# Altium PCB Green.PcbDoc (part 2 of 2)
Units mil, origin at the board's own origin, x right, y up, seen from the top; angles counter-clockwise.
Board outline 6000 x 4000 mil, 4 copper layers (Top Layer, VCC, GND, Bottom Layer); 96 components, 58 nets, 276 pads, 296 vias.
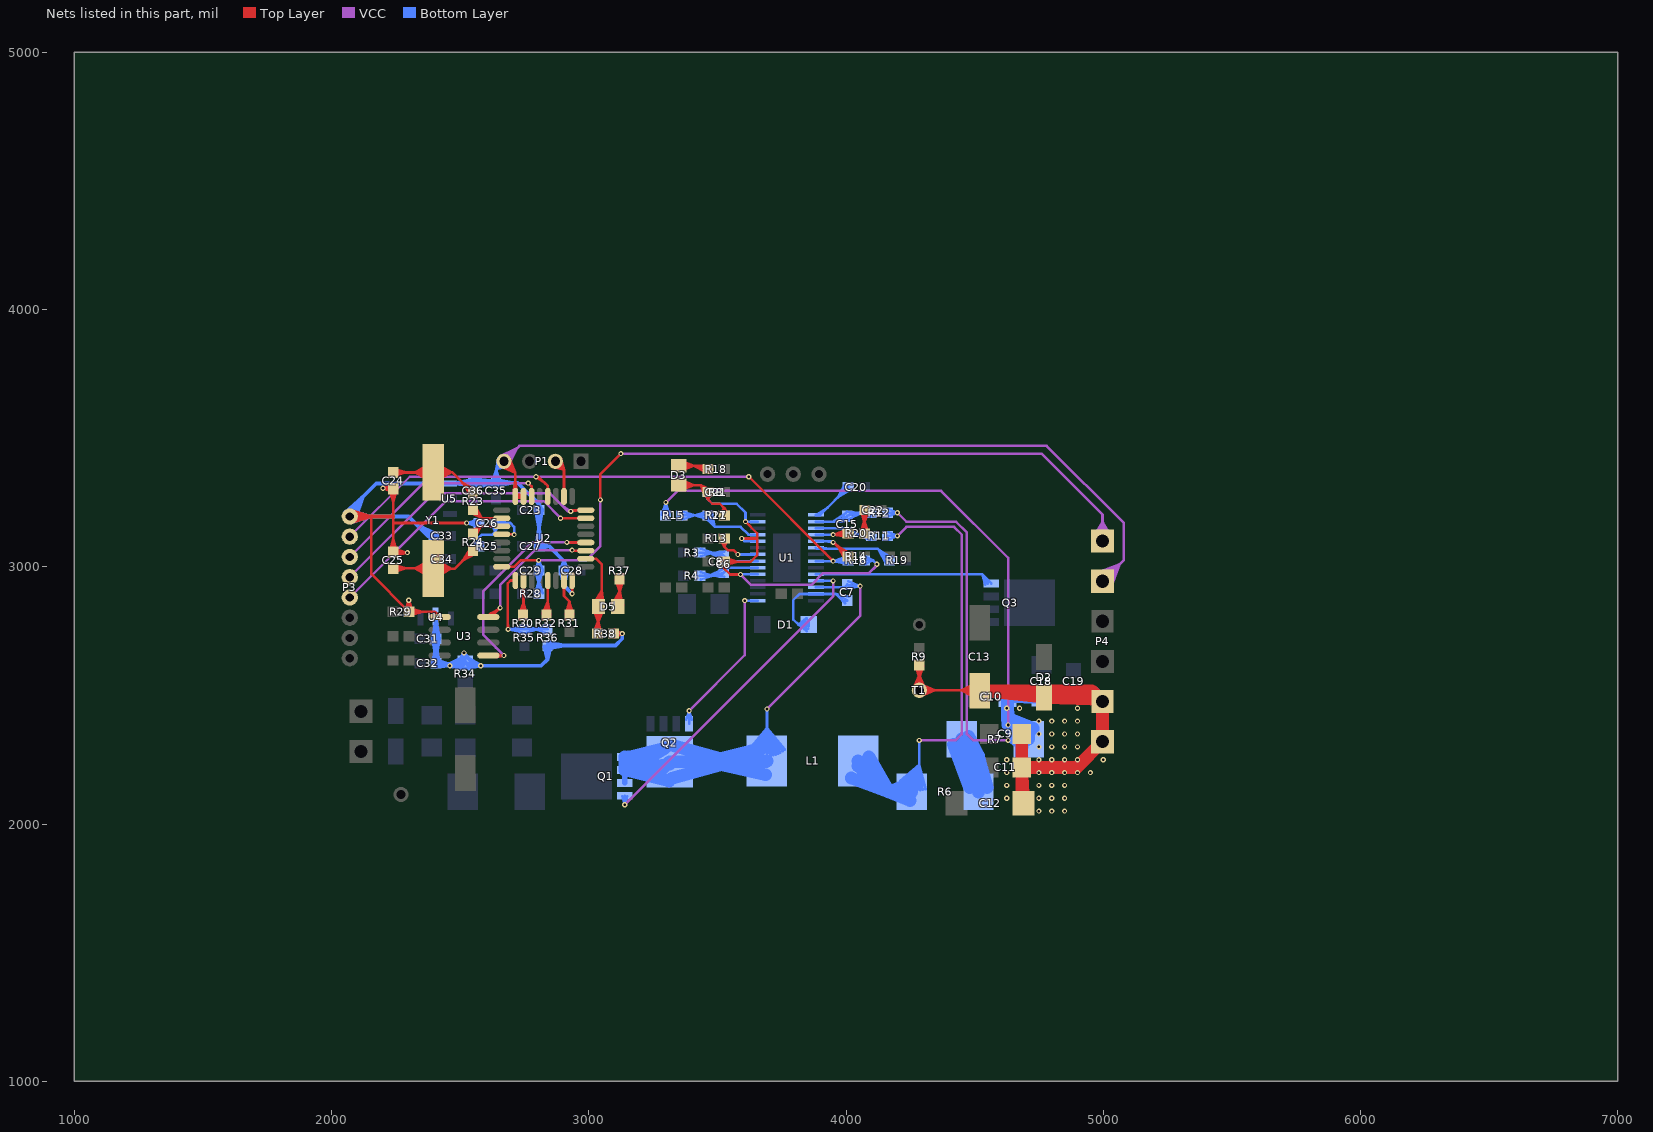
[diagram p4: the nets of this part, all layers, seen from the top]

## Via types
v1: diameter 20, hole 10, Top Layer to Bottom Layer, tented both sides, 286 vias
v2: diameter 20, hole 10, Top Layer to Bottom Layer, 8 vias
v3: diameter 25, hole 15, Top Layer to Bottom Layer, tented both sides, 2 vias

## Nets (pads, with @x,y where several pads share a name; then routed paths per layer and width w, separated by ;. In a path a pad name is that pad's centre, name@x,y a point inside that pad or via, vN(x,y) a via of type N, cw(c..) or ccw(c..) an arc to the next point about the centre after c; other vN are vias at no path point) (continued)
LP-: C23.1 C24.2 C25.2 C26.1 C27.2 C28.1 C31.1 C32.1 C33.1 C34.1 C35.1 C36.1 P1.4 P3.1 P4.5 R29.1 R34.1 R36.1 R38.2 U2.16 U2.31 U2.32 U3.5 U4.2 U5.1 | length 18503.3
  Top Layer w10: 2155,3195.59 2155,2971.5 R29.1@2301.5,2825 ; C25.2@2225.45,3060.46 2239.41,3108.16 ; C24.2@2225.48,3299.37 2240,3251.85 ; C24.2@2236.77,3289.18 v1(2200,3305) ; C24.2@2237.85,3318.03 v1(2200,3305) ; 2239.41,3195.59 2239.41,3170 ; C25.2@2240,3058.46 2239.41,3108.16 ; 2240,3195.59 C24.2@2240,3303.5 ; C24.2@2240,3301.54 2240,3251.85 ; C25.2@2241.73,3041.91 v1@2289.71,3055 ; C25.2@2242.6,3070.95 v1@2289.71,3055 ; C25.2@2254.5,3060.81 2239.41,3108.16 ; C24.2@2254.52,3299.37 2240,3251.85 ; C25.2@2255.01,3056.04 v1(2295,3055) ; C25.2@2255.64,3045.71 v1(2295,3055) ; C25.2@2255.98,3066.42 v1(2295,3055) ; R29.1@2286.94,2826.91 v1(2300,2870) ; R29.1@2303.46,2825 2353.15,2825 ; R29.1@2305.63,2810.48 2353.15,2825 ; R29.1@2305.63,2839.52 2353.15,2825 ; R29.1@2315.9,2827.87 v1(2300,2870) ; U3.5@2415.15,2800.8 2400.51,2825 ; U3.5@2420.51,2805 2400.51,2825 ; U3.5@2424.71,2810.36 2400.51,2825 ; 2485,3170 v1(2525,3170) 2239.41,3170 ; P1.4@2656.34,3389.63 2714.76,3365.24 ; P1.4@2660.97,3398.62 2714.76,3365.24 ; P1.4@2670,3410 2714.76,3365.24 ; P1.4@2681.38,3419.03 2714.76,3365.24 ; P1.4@2690.37,3423.66 2714.76,3365.24 ; U2.32@2708.95,3296.44 2714.76,3336.85 ; U2.32@2714.22,3267.58 U2.31@2745.72,3267.58 ; U2.32@2714.22,3279.19 U2.31@2745.72,3279.19 ; U2.32@2714.76,3296.02 2714.76,3336.85 ; U2.32@2715.3,3267.58 U2.31@2746.26,3273.39 ; U2.32@2715.3,3279.19 U2.31@2746.26,3273.39 ; U2.32@2716.36,3267.78 U2.31@2745.72,3279.19 ; U2.32@2716.36,3278.99 U2.31@2745.72,3267.58 ; U2.32@2720.58,3296.44 2714.76,3336.85 ; v1(2935,2895) U2.16@2935,2946.38 ; v1(2200,3305) 2238.5,3305 C24.2@2240,3303.5 ; v1(2200,3305) C24.2@2240,3303.5 ; 2239.41,3170 2239.41,3057.09 C25.2@2240,3056.5 ; C25.2@2240,3056.5 2241.5,3055 v1(2295,3055) ; C25.2@2240,3056.5 v1@2289.71,3055 ; v1(2300,2870) 2300,2826.5 R29.1@2301.5,2825 ; v1(2300,2870) R29.1@2301.5,2825 ; R29.1@2301.5,2825 2400.51,2825 ; U2.32@2714.76,3273.39 U2.31@2746.26,3273.39 ; U2.32@2714.76,3273.39 2714.76,3365.24 ; U2.32@2714.76,3273.39 U2.31@2745.72,3267.58 ; U2.32@2714.76,3273.39 U2.31@2745.72,3279.19 ; v1(3130,2740) R38.2@3096.5,2740 v1(3130,2740) ; v1(3130,2740) 3101.88,2754.28 v1(3130,2740) ; v1(3130,2740) 3101.88,2725.72 v1(3130,2740) ; v1(3130,2740) 3098.46,2740 v1(3130,2740)
  Top Layer w15: P3.1@2070.87,3195.59 2155,3195.59 2239.41,3195.59 ; P3.1@2071.4,3186.61 2147.36,3195.59 ; P3.1@2071.4,3204.57 2147.36,3195.59 ; P3.1@2074.63,3171.89 2147.36,3195.59 ; P3.1@2074.63,3219.29 2147.36,3195.59
  VCC w10: P1.4@2655.88,3430.05 2720.74,3460.74 ; P1.4@2660.82,3421.26 2720.74,3460.74 ; P1.4@2670,3410 2730,3470 4780,3470 5080,3170 5080,3026.57 P4.5@4997.28,2943.86 ; P1.4@2681.26,3400.82 2720.74,3460.74 ; P1.4@2690.05,3395.88 2720.74,3460.74 ; P4.5@4975.56,2977.78 5063.77,3010.35 ; P4.5@4979.6,2968.43 5063.77,3010.35 ; P4.5@4984.58,2959.66 5063.77,3010.35 ; P4.5@4990.43,2951.51 5063.77,3010.35 ; P4.5@5004.94,2937 5063.77,3010.35 ; P4.5@5013.08,2931.15 5063.77,3010.35 ; P4.5@5021.86,2926.18 5063.77,3010.35 ; P4.5@5031.2,2922.14 5063.77,3010.35
  Bottom Layer w10: C32.1@2406.5,2625 C32.1@2416.5,2615 ; C26.1@2569.22,3155.5 v1(2525,3170) ; C26.1@2569.22,3184.5 v1(2525,3170) ; C26.1@2571.54,3170 v1(2525,3170) ; C26.1@2573.5,3170 v1(2525,3170) ; C35.1@2625.48,3330.63 2640,3378.15 ; C35.1@2640,3326.5 2640,3380 ; C35.1@2640,3328.46 2640,3378.15 ; P1.4@2648.38,3421.59 2640,3380 ; C35.1@2654.52,3330.63 2640,3378.15 ; P1.4@2658.12,3418.36 2640,3380 ; P1.4@2670,3410 2640,3380 ; P1.4@2678.36,3398.12 2640,3380 ; P1.4@2681.59,3388.38 2640,3380
  Bottom Layer w15: P3.1@2052.82,3211.41 2121.11,3271.11 ; P3.1@2063.63,3200.94 2121.11,3271.11 ; P3.1@2071.4,3186.61 2147.36,3195.59 ; P3.1@2071.4,3204.57 2147.36,3195.59 ; P3.1@2074.63,3171.89 2147.36,3195.59 ; P3.1@2074.63,3219.29 2147.36,3195.59 ; P3.1@2078.59,3190.99 2121.11,3271.11 ; P3.1@2092.43,3185.06 2121.11,3271.11 ; C34.1@2384.35,3029.91 C33.1@2389.9,3106.12 ; C34.1@2386.35,3030.82 C33.1@2398.5,3120 ; C33.1@2386.54,3117.69 2405,3054.08 ; 2388.31,3324.06 U5.1@2445.12,3324.06 ; C34.1@2388.45,3028.03 2405,2964.62 ; C34.1@2388.45,3031.97 2405,3095.3 ; C34.1@2388.58,3032.63 2408.47,3094.35 ; C33.1@2389.04,3110.39 2333.75,3161.25 ; C32.1@2394.37,2626.15 2406.5,2689.68 C32.1@2418.63,2626.15 ; C31.1@2394.37,2718.85 2406.5,2655.32 C31.1@2418.63,2718.85 ; C31.1@2394.34,2720.88 U4.2@2405,2783.39 ; C31.1@2394.37,2721.15 2406.5,2784.68 C31.1@2418.63,2721.15 ; C34.1@2396.54,3030 C33.1@2389.9,3106.12 ; C34.1@2398.5,3030 C33.1@2398.5,3120 ; C33.1@2402.38,3130.69 2333.75,3161.25 ; 2405,2925 2405,3113.5 C33.1@2398.5,3120 ; C32.1@2406.5,2625 C31.1@2406.5,2720 ; C31.1@2406.5,2726.56 U4.2@2405,2783.39 ; U4.2@2406.5,2805.51 C31.1@2406.5,2720 ; C34.1@2408.55,3032.02 C33.1@2389.9,3106.12 ; C34.1@2410.66,3030.82 C33.1@2398.5,3120 ; C33.1@2410.69,3120.07 2405,3054.08 ; C34.1@2412.65,3029.64 2408.47,3094.35 ; C34.1@2412.65,3029.71 2405,2964.62 ; C34.1@2412.65,3030.29 2405,3095.3 ; C32.1@2416.5,2615 2508.66,2615 R34.1@2520,2626.34 ; C31.1@2418.59,2721.46 U4.2@2405,2783.39 ; R34.1@2498.25,2629.8 v1(2515,2665) ; R34.1@2509.27,2645.39 v1(2460,2615) ; R34.1@2513.68,2647.44 2443.75,2615 ; R34.1@2514.33,2625.49 v1(2460,2615) ; R34.1@2514.4,2605.11 v1(2460,2615) ; R34.1@2519.88,2604.31 v1(2580,2615) ; R34.1@2520.09,2604.31 2443.75,2615 ; R34.1@2527.93,2646.89 v1(2580,2615) ; C36.1@2533.43,3324.06 U5.1@2476.61,3324.06 ; C36.1@2533.48,3325.87 U5.1@2476.61,3324.06 ; C36.1@2534.07,3316.64 U5.1@2476.61,3324.06 ; C36.1@2534.52,3335.39 U5.1@2476.61,3324.06 ; R34.1@2540.16,2635.22 v1(2515,2665) ; C36.1@2548.4,3338.58 U5.1@2485.22,3324.06 ; C36.1@2549.31,3314.33 U5.1@2485.22,3324.06 ; C36.1@2549.94,3312.34 2614.37,3318.11 ; C36.1@2550,3328.46 2618.61,3334.03 ; C36.1@2550.09,3340.65 2618.61,3334.03 ; C36.1@2550.69,3314.33 2614.78,3324.06 ; C36.1@2550.82,3314.34 C35.1@2640,3326.5 ; C36.1@2550.82,3338.65 C35.1@2640,3326.5 ; C36.1@2551.6,3338.58 2614.78,3324.06 ; C36.1@2552.06,3316.45 2618.61,3334.03 ; C36.1@2552.34,3336.48 2614.37,3318.11 ; C35.1@2638.4,3338.58 2575.18,3324.06 ; C35.1@2639.31,3314.33 2575.18,3324.06 ; C35.1@2641.15,3314.37 2704.69,3326.5 C35.1@2641.15,3338.63 ; C27.2@2794.37,3081.15 2806.5,3144.68 C27.2@2818.63,3081.15 ; C23.1@2794.37,3218.85 2806.5,3155.32 C23.1@2818.63,3218.85 ; C27.2@2808.46,3080 2845,3080 ; C27.2@2810.5,3067.99 2845,3080 ; C27.2@2810.5,3092.01 2845,3080 ; R36.1@2827.9,2690.09 2840,2640 ; R36.1@2840,2691.54 2840,2640 ; R36.1@2841.15,2681.37 2904.68,2693.5 R36.1@2841.15,2705.63 ; R36.1@2852.1,2690.09 2840,2640 ; C28.1@2891.39,2983.73 2903.5,2926.5 ; C28.1@2891.49,2987.03 2903.5,3021.5 ; C28.1@2915.52,2987.03 2903.5,3021.5 ; C28.1@2915.62,2983.73 2903.5,2926.5 ; v1(2935,2895) 2903.5,2926.5 ; v1(3130,2740) 3130,2720 3103.5,2693.5 R36.1@2840,2693.5 2840,2640 ; P3.1@2070.87,3195.59 2070.87,3220.87 2174.06,3324.06 U5.1@2460.87,3324.06 2637.56,3324.06 C35.1@2640,3326.5 ; P3.1@2070.87,3195.59 2299.41,3195.59 2375,3120 ; P3.1@2070.87,3195.59 2121.11,3271.11 ; 2333.75,3161.25 C33.1@2396.54,3120 ; 2375,3120 C33.1@2398.5,3120 ; 2375,3120 2393.09,3108.31 2375,3120 ; 2375,3120 2393.09,3131.69 2375,3120 ; 2375,3120 C33.1@2396.54,3120 ; 2375,3120 C33.1@2396.54,3120 ; C34.1@2389.43,3035.16 2405,3054.08 ; C34.1@2389.43,3035.16 2405,3054.08 ; C34.1@2389.43,3035.16 2405,3054.08 ; C33.1@2398.5,3120 2405,3054.08 ; C34.1@2400.47,3030 2408.47,3094.35 ; C34.1@2400.47,3030 2405,3054.08 ; C34.1@2400.47,3030 2405,3054.08 ; C34.1@2400.47,3030 2405,3054.08 ; C34.1@2400.47,3030 2405,3095.3 ; C34.1@2400.47,3030 2405,2964.62 ; U4.2@2405,2783.39 C31.1@2406.5,2720 ; 2405,3054.08 C34.1@2412.63,3030.8 ; 2405,3054.08 C34.1@2412.63,3030.8 ; 2405,3054.08 C34.1@2412.63,3030.8 ; 2443.75,2615 R34.1@2520,2626.34 ; 2443.75,2615 v1(2460,2615) ; 2443.75,2615 v1(2460,2615) ; 2443.75,2615 v1(2460,2615) ; v1(2460,2615) 2475.56,2615 ; v1(2460,2615) 2407.76,2612.84 2475.56,2615 ; v1(2460,2615) 2475.56,2615 ; v1(2460,2615) 2408.46,2625 2475.56,2615 ; v1(2460,2615) 2475.56,2615 ; v1(2460,2615) 2411.34,2636.84 2475.56,2615 ; U5.1@2485.22,3324.06 C36.1@2550,3326.5 ; v1(2515,2665) 2515,2631.34 2531.34,2615 v1(2580,2615) ; v1(2515,2665) R34.1@2520,2626.34 ; R34.1@2520,2626.34 v1(2580,2615) ; C36.1@2550,3324.53 2614.37,3318.11 ; C36.1@2550,3324.53 2575.18,3324.06 ; C36.1@2550,3324.53 2575.18,3324.06 ; C36.1@2550,3324.53 2575.18,3324.06 ; C36.1@2550,3326.5 2614.78,3324.06 ; C36.1@2550,3326.5 C35.1@2640,3326.5 ; C36.1@2552.73,3312.65 2575.18,3324.06 ; C36.1@2552.73,3312.65 2575.18,3324.06 ; C36.1@2552.73,3312.65 2575.18,3324.06 ; C36.1@2553.17,3336.29 2575.18,3324.06 ; C36.1@2553.17,3336.29 2575.18,3324.06 ; C36.1@2553.17,3336.29 2575.18,3324.06 ; 2575.18,3324.06 C35.1@2640,3326.5 ; v1(2580,2615) 2815,2615 2840,2640 ; C35.1@2640,3326.5 2723.5,3326.5 2806.5,3243.5 ; C23.1@2806.5,3220 2806.5,3243.5 ; C23.1@2806.5,3220 C27.2@2806.5,3080 2845,3080 ; C23.1@2806.5,3220 2806.5,3243.5 ; 2806.5,3243.5 2794.73,3223.16 2806.5,3243.5 ; 2806.5,3243.5 2818.26,3223.16 2806.5,3243.5 ; 2845,3080 2903.5,3021.5 ; 2903.5,2926.5 C28.1@2903.5,2985 2903.5,3021.5
NetC6_1: C6.1 R4.1 U1.6 | length 595.4
  Bottom Layer w10: R4.1@3431.5,2965 3511.5,2965 C6.1@3525,2978.5 3543.11,2996.61 U1.6@3656.81,2996.61 ; R4.1@3433.46,2965 3483.15,2965 ; R4.1@3435.63,2950.48 3483.15,2965 ; R4.1@3435.63,2979.52 3483.15,2965 ; C6.1@3520.2,2990.41 3469.17,2965 ; C6.1@3525,2976.54 3469.17,2965 ; C6.1@3526.09,2961.89 3469.17,2965 ; 3596.3,2996.61 U1.6@3633.19,2996.61
NetC6_2: C6.2 R3.1 U1.7 | length 595.9
  Bottom Layer w10: R3.1@3431.5,3055 3511.5,3055 C6.2@3525,3041.5 3544.29,3022.2 U1.7@3656.81,3022.2 ; R3.1@3433.46,3055 3483.15,3055 ; R3.1@3435.63,3040.48 3483.15,3055 ; R3.1@3435.63,3069.52 3483.15,3055 ; C6.2@3520.2,3029.59 3469.17,3055 ; C6.2@3525,3043.46 3469.17,3055 ; C6.2@3526.09,3058.11 3469.17,3055 ; 3596.3,3022.2 U1.7@3633.19,3022.2
NetC7_1: C7.1 L1.1 Q1.1 Q1.2 Q1.3 Q2.5 U1.26 | length 6198.6
  VCC w10: v1(3692.83,2447.17) 4055,2809.33 v1(4055,2925)
  Bottom Layer w10: L1.1@3623.46,2289.69 3692.83,2373.43 ; L1.1@3631.89,2283.37 3692.83,2373.43 ; L1.1@3640.76,2277.96 3692.83,2373.43 ; L1.1@3649.99,2273.48 3692.83,2373.43 ; L1.1@3659.5,2269.92 3692.83,2373.43 ; L1.1@3669.24,2267.28 3692.83,2373.43 ; L1.1@3679.12,2265.55 3692.83,2373.43 ; v1@3690,2450 v1(3692.83,2447.17) L1.1@3692.83,2245 ; L1.1@3692.83,2264.69 3692.83,2373.43 ; L1.1@3706.55,2265.55 3692.83,2373.43 ; L1.1@3716.43,2267.28 3692.83,2373.43 ; L1.1@3726.17,2269.92 3692.83,2373.43 ; L1.1@3735.68,2273.48 3692.83,2373.43 ; L1.1@3744.91,2277.96 3692.83,2373.43 ; L1.1@3753.78,2283.37 3692.83,2373.43 ; L1.1@3762.21,2289.69 3692.83,2373.43 ; U1.26@3883.19,2919.84 3993.35,2919.84 C7.1@4005,2931.5 4011.5,2925 v1(4055,2925) ; U1.26@3906.81,2919.84 3943.7,2919.84 ; C7.1@4005,2929.53 v1(4055,2925) ; C7.1@4005.83,2914.87 v1(4055,2925) ; C7.1@4008.45,2943.8 v1(4055,2925)
  Bottom Layer w20: Q1.3@3140,2160 Q1.2@3140,2210 Q1.1@3140,2260
  Bottom Layer w50: Q2.5@3323.79,2177.61 3554.96,2241.97 Q2.5@3323.79,2306.33 ; L1.1@3685.82,2298.28 3464.06,2241.97 ; L1.1@3687.23,2191.55 3464.06,2241.97 ; L1.1@3689.8,2241.97 Q2.5@3315,2241.97 Q2.5@3283.03,2210 ; L1.1@3692.83,2245 3464.06,2241.97 ; Q1.2@3140,2210 Q2.5@3283.03,2210 ; Q1.2@3140,2210 3311.36,2167.86 Q1.2@3154.57,2210 ; Q1.2@3140,2210 Q2.5@3294.92,2294.5 ; Q1.2@3140,2210 3315,2232.72 Q1.2@3154.57,2210 ; Q1.2@3140,2210 Q1.1@3140,2260 Q1.2@3154.57,2210 ; Q1.2@3154.57,2210 Q2.5@3283.03,2210 ; Q1.2@3154.57,2210 Q2.5@3294.92,2294.5 ; Q2.5@3294.92,2294.5 3154.57,2260 Q2.5@3294.92,2294.5
NetC7_2: C7.2 D1.2 U1.27 | length 842.3
  Bottom Layer w10: 3822.68,2894.25 U1.27@3859.57,2894.25 ; D1.2@3846.89,2749.96 3815,2775 ; D1.2@3846.89,2800.04 3815,2775 ; D1.2@3852.2,2758.85 3815,2775 ; D1.2@3852.2,2791.15 3815,2775 ; D1.2@3855.03,2768.52 3815,2775 ; D1.2@3855.03,2781.48 3815,2775 ; D1.2@3855.55,2775 3815,2775 ; U1.27@3906.81,2894.25 3943.7,2894.25 ; C7.2@3996.23,2858.69 3960.75,2894.25 ; C7.2@4005,2868.5 3986.5,2868.5 3960.75,2894.25 ; C7.2@4005,2870.47 3960.75,2894.25 ; C7.2@4009.99,2884.29 3960.75,2894.25 ; 3815,2775 3795,2795 3795,2870 3819.25,2894.25 U1.27@3883.19,2894.25 3960.75,2894.25
NetC15_1: C15.1 R11.1 U1.17 | length 584.8
  Bottom Layer w10: U1.17@3883.19,3150.16 3988.35,3150.16 C15.1@4005,3133.5 4018.5,3120 R11.1@4098.5,3120 ; U1.17@3906.81,3150.16 3943.7,3150.16 ; C15.1@4003.91,3116.89 4060.83,3120 ; C15.1@4005,3131.54 4060.83,3120 ; C15.1@4009.8,3145.41 4060.83,3120 ; R11.1@4094.37,3105.48 4046.85,3120 ; R11.1@4094.37,3134.52 4046.85,3120 ; R11.1@4096.54,3120 4046.85,3120
NetC15_2: C15.2 R12.1 U1.16 | length 932.3
  Bottom Layer w10: U1.16@3883.19,3175.75 3984.25,3175.75 ; U1.16@3906.81,3175.75 3943.7,3175.75 ; C15.2@3998.66,3207.77 3948.73,3175.75 ; C15.2@4003.91,3213.11 4060.83,3210 ; C15.2@4005,3198.46 4060.83,3210 ; C15.2@4007.89,3180.13 3948.73,3175.75 ; C15.2@4009.8,3184.59 4060.83,3210 ; R12.1@4094.37,3195.48 4046.85,3210 ; R12.1@4094.37,3224.52 4046.85,3210 ; R12.1@4096.54,3210 4046.85,3210 ; R12.1@4098.5,3210 4018.5,3210 C15.2@4005,3196.5 3984.25,3175.75 ; 3948.73,3175.75 C15.2@4005,3194.53 ; 3984.25,3175.75 4011.65,3181.44 3984.25,3175.75 ; 3984.25,3175.75 3992.63,3202.45 3984.25,3175.75 ; 3984.25,3175.75 C15.2@4005,3194.53 ; 3984.25,3175.75 C15.2@4005,3194.53
NetC20_2: C20.2 U1.15 | length 393.9
  Bottom Layer w10: 3928.91,3230.4 U1.15@3883.19,3201.34 3899.84,3201.34 C20.2@4008.5,3310 ; C20.2@3994.67,3318.66 3967.61,3269.1 ; C20.2@4006.54,3310 3967.61,3269.1 ; C20.2@4015.77,3298.58 3967.61,3269.1
NetC21_1: C21.1 D3.2 R21.1 | length 763.6
  Top Layer w10: D3.2@3350,3317.6 3435.91,3317.6 ; D3.2@3353.94,3317.6 3409.53,3317.6 ; D3.2@3354.95,3307.06 3409.53,3317.6 ; D3.2@3354.95,3328.14 3409.53,3317.6 ; D3.2@3357.75,3297.36 3409.53,3317.6 ; D3.2@3357.75,3337.83 3409.53,3317.6 ; C21.1@3449.03,3282.3 3435.91,3317.6 ; C21.1@3449.31,3286.22 3463.5,3261.5 ; C21.1@3461.54,3290 3435.91,3317.6 ; C21.1@3470.14,3301.9 3435.91,3317.6 ; C21.1@3477.69,3286.22 3463.5,3261.5 ; R21.1@3512.31,3203.78 3526.5,3228.5 ; R21.1@3526.5,3200 3526.5,3228.5 ; R21.1@3540.69,3203.78 3526.5,3228.5 ; 3435.91,3317.6 C21.1@3463.5,3290 3463.5,3261.5 ; 3463.5,3261.5 3480,3245 3510,3245 3526.5,3228.5
NetC22_2: C22.2 R20.2 | length 339.6
  Top Layer w10: R20.2@4056.97,3132.17 4071.5,3179.68 R20.2@4086.02,3132.17 ; C22.2@4058.9,3218.42 4071.5,3170.25 ; R20.2@4071.5,3130 C22.2@4071.5,3217.99 ; C22.2@4073.5,3220 4071.5,3170.25 ; C22.2@4087.93,3217.25 4071.5,3170.25
  Top Layer w12: C22.2@4071.5,3217.99 C22.2@4073.5,3220
NetC24_1: C24.1 R23.1 Y1.2 | length 1824.4
  Top Layer w10: C24.1@2240,3366.5 Y1.2@2394.49,3366.5 ; C24.1@2242.17,3351.97 2289.69,3366.5 C24.1@2242.17,3381.02 ; Y1.2@2385.49,3402.08 2323.66,3366.5 ; Y1.2@2386,3331.8 2323.66,3366.5 ; Y1.2@2389.95,3392.86 2323.66,3366.5 ; Y1.2@2390.32,3341.09 2323.66,3366.5 ; Y1.2@2393.01,3383.23 2323.66,3366.5 ; Y1.2@2393.25,3350.76 2323.66,3366.5 ; Y1.2@2394.67,3373.34 2323.66,3366.5 ; Y1.2@2394.76,3360.67 2323.66,3366.5 ; Y1.2@2395.28,3360.68 2466.34,3367.01 ; Y1.2@2395.28,3373.34 2466.34,3367.01 ; Y1.2@2396.87,3350.78 2466.34,3367.01 ; Y1.2@2396.87,3383.24 2466.34,3367.01 ; Y1.2@2399.86,3341.12 2466.34,3367.01 ; Y1.2@2399.86,3392.89 2466.34,3367.01 ; Y1.2@2404.26,3331.87 2466.34,3367.01 ; Y1.2@2404.26,3402.15 2466.34,3367.01 ; R23.1@2538.58,3279.23 2509.1,3327.39 ; R23.1@2550,3286.5 2469.49,3367.01 Y1.2@2395,3367.01 2323.66,3366.5 ; R23.1@2550,3288.46 2509.1,3327.39 ; R23.1@2558.66,3300.33 2509.1,3327.39
NetC25_1: C25.1 R24.1 Y1.1 | length 1821
  Top Layer w10: C25.1@2240,2993.5 2394.49,2993.5 Y1.1@2395,2992.99 ; C25.1@2242.17,2978.98 2289.68,2993.5 C25.1@2242.17,3008.03 ; Y1.1@2385.49,2957.92 2323.66,2993.5 ; Y1.1@2386,3028.2 2323.66,2993.5 ; Y1.1@2389.95,2967.14 2323.66,2993.5 ; Y1.1@2390.32,3018.91 2323.66,2993.5 ; Y1.1@2393.01,2976.77 2323.66,2993.5 ; Y1.1@2393.25,3009.24 2323.66,2993.5 ; Y1.1@2394.67,2986.66 2323.66,2993.5 ; Y1.1@2394.76,2999.33 2323.66,2993.5 ; Y1.1@2395.28,2986.66 2466.34,2992.99 ; Y1.1@2395.28,2999.32 2466.34,2992.99 ; Y1.1@2396.87,2976.76 2466.34,2992.99 ; Y1.1@2396.87,3009.22 2466.34,2992.99 ; Y1.1@2399.86,2967.11 2466.34,2992.99 ; Y1.1@2399.86,3018.88 2466.34,2992.99 ; Y1.1@2404.26,2957.85 2466.34,2992.99 ; Y1.1@2404.26,3028.13 2466.34,2992.99 ; R24.1@2538.58,3070.77 2509.1,3022.61 ; R24.1@2550,3061.54 2509.1,3022.61 ; R24.1@2550,3063.5 2479.49,2992.99 Y1.1@2395,2992.99 ; R24.1@2558.66,3049.67 2509.1,3022.61 ; 2323.66,2993.5 Y1.1@2395,2992.99
NetC26_2: C26.2 R25.1 U2.4 | length 621
  Top Layer w10: U2.4@2661.61,3125.75 2709.25,3125.75 v1(2710,3125) U2.4@2669.98,3125.75
  Bottom Layer w10: R25.1@2559.18,3083.22 2573.5,3113.5 ; R25.1@2573.5,3080 2573.5,3113.5 ; R25.1@2587.83,3083.22 2573.5,3113.5 ; C26.2@2622.17,3166.78 2636.5,3136.5 ; C26.2@2638.46,3170 2688.15,3170 ; C26.2@2640.63,3155.48 2688.15,3170 ; C26.2@2640.63,3184.52 2688.15,3170 ; C26.2@2650.82,3166.78 2636.5,3136.5 ; v1(2710,3125) 2710,3155 2695,3170 C26.2@2636.5,3170 2636.5,3136.5 ; 2573.5,3113.5 2585,3125 2625,3125 2636.5,3136.5
NetD3_1: D3.1 R18.2 | length 563.1
  Top Layer w10: D3.1@3350,3392.4 3451.1,3392.4 R18.2@3463.5,3380 ; D3.1@3353.94,3392.4 3409.53,3392.4 ; D3.1@3354.95,3381.86 3409.53,3392.4 ; D3.1@3354.95,3402.94 3409.53,3392.4 ; D3.1@3357.75,3372.17 3409.53,3392.4 ; D3.1@3357.75,3412.64 3409.53,3392.4 ; R18.2@3456.39,3366.25 3407.45,3392.4 ; R18.2@3461.54,3380 3407.45,3392.4 ; R18.2@3462.89,3394.62 3407.45,3392.4
NetD5_1: D5.1 R37.1 | length 544.6
  Top Layer w10: D5.1@3092.83,2855.35 3120,2905.21 ; D5.1@3102.08,2851.33 3120,2905.21 ; R37.1@3105.48,2949.37 3120,2901.85 ; D5.1@3112.4,2845 3120,2852.6 R37.1@3120,2953.5 ; D5.1@3112.4,2848.94 3120,2905.21 ; R37.1@3120,2951.54 3120,2901.85 ; D5.1@3122.98,2848.5 3120,2905.21 ; D5.1@3132.97,2849.93 3120,2905.21 ; R37.1@3134.52,2949.37 3120,2901.85
NetQ1_4: Q1.4 U1.25 | length 1494.4
  VCC w10: v1(3140,2075) 3950,2885 v1(3950,2945)
  Bottom Layer w10: Q1.4@3129.76,2108.47 v1(3140,2075) ; Q1.4@3140,2110 v1(3140,2075) ; Q1.4@3150.24,2108.47 v1(3140,2075) ; U1.25@3883.19,2945.43 3949.57,2945.43 v1(3950,2945) ; U1.25@3906.81,2945.43 v1@3943.7,2945.43 ; v1(3950,2945) 3909.99,2945.43 v1(3950,2945)
NetQ2_4: Q2.4 U1.1 | length 902.8
  VCC w10: v1(3390,2440) 3606.34,2656.34 v1(3606.34,2868.66) 3606.34,2828.66
  Bottom Layer w10: Q2.4@3390,2390 v1(3390,2440) ; Q2.4@3390,2400 v1(3390,2440) ; Q2.4@3400.24,2406.08 v1(3390,2440) ; U1.1@3633.19,2868.66 v1(3606.34,2868.66) U1.1@3656.81,2868.66 ; v1(3390,2440) 3379.76,2406.08 v1(3390,2440) ; v1(3390,2440) 3390,2404.57 v1(3390,2440)
NetQ3_4: Q3.4 U1.24 | length 859.4
  Bottom Layer w10: U1.24@3883.19,2971.02 4528.98,2971.02 ; U1.24@3906.81,2971.02 3943.7,2971.02 ; Q3.4@4540.95,2930.84 4528.98,2971.02 ; Q3.4@4550.43,2935 4528.98,2971.02 ; Q3.4@4558.61,2941.36 4528.98,2971.02 ; Q3.4@4565,2935 4528.98,2971.02
NetR6_2: R6.2 R7.2 | length 4208.8
  Bottom Layer w50: R7.2@4417.25,2309.14 R6.2@4481.17,2141.33 ; R7.2@4418.81,2304.69 R6.2@4514.92,2125 ; R7.2@4419.15,2303.93 R6.2@4514.92,2136.81 ; R7.2@4421.83,2299.16 R6.2@4548.68,2141.33 ; R7.2@4450.08,2330 4514.92,2265.16 ; R7.2@4481.11,2332.21 R6.2@4548.68,2141.33 ; R7.2@4483.03,2326.77 R6.2@4514.92,2136.81 ; R7.2@4483.16,2326.29 R6.2@4514.92,2125 ; R7.2@4484.03,2320.88 R6.2@4481.17,2141.33 ; R7.2@4434.33,2288 4514.92,2265.16 ; R7.2@4434.33,2288 4514.92,2265.16 ; R7.2@4434.33,2288 4514.92,2265.16 ; R7.2@4434.33,2288 4514.92,2265.16 ; R7.2@4434.33,2288 4514.92,2265.16 ; R7.2@4450.08,2318.19 4514.92,2265.16 ; R7.2@4450.08,2318.19 R6.2@4514.92,2125 ; R7.2@4450.08,2318.19 4514.92,2265.16 ; R7.2@4450.08,2318.19 R6.2@4514.92,2136.81 ; R7.2@4450.08,2318.19 4514.92,2265.16 ; R7.2@4450.08,2318.19 4514.92,2265.16 ; R7.2@4450.08,2318.19 R6.2@4481.17,2141.33 ; R7.2@4450.08,2318.19 R6.2@4548.68,2141.33 ; R7.2@4450.08,2318.19 4514.92,2265.16 ; R7.2@4476.55,2339.62 4514.92,2265.16 ; R7.2@4476.55,2339.62 4514.92,2265.16 ; R7.2@4476.55,2339.62 4514.92,2265.16 ; R7.2@4476.55,2339.62 4514.92,2265.16 ; R7.2@4476.55,2339.62 4514.92,2265.16 ; R6.2@4481.17,2141.33 4514.92,2265.16 ; R6.2@4514.92,2125 4514.92,2265.16 ; R6.2@4514.92,2136.81 4514.92,2265.16 ; 4514.92,2265.16 R6.2@4548.68,2141.33
NetR13_1: R13.1 U1.8 | length 298.7
  Top Layer w10: R13.1@3512.22,3106.58 3526.5,3078.5 ; R13.1@3526.5,3110 3526.5,3078.5 ; R13.1@3540.78,3106.58 3526.5,3078.5 ; 3526.5,3078.5 3540,3065 3562.8,3065 ; 3562.8,3065 v1(3580,3047.8) 3562.8,3065
  Bottom Layer w10: v1(3580,3047.8) U1.8@3656.81,3047.8 ; 3596.3,3047.8 U1.8@3633.19,3047.8
NetR14_1: R14.1 U1.19 | length 482.4
  Top Layer w10: 3982.8,3065.71 v1(3950,3095) 3953.5,3095 R14.1@4008.5,3040 ; R14.1@3994.67,3031.34 3967.61,3080.9 ; R14.1@4006.54,3040 3967.61,3080.9 ; R14.1@4015.77,3051.42 3967.61,3080.9
  Bottom Layer w10: U1.19@3883.19,3098.98 3946.02,3098.98 v1(3950,3095) ; U1.19@3906.81,3098.98 v1@3943.7,3098.98 ; U1.19@3908.9,3098.98 v1(3950,3095) ; U1.19@3909.12,3098.98 v1(3950,3095)
NetR15_2: R15.2 R17.1 U1.11 | length 802
  Bottom Layer w10: R15.2@3361.5,3200 R17.1@3463.5,3200 3463.5,3181.5 3490,3155 ; R15.2@3363.46,3200 3413.15,3200 ; R15.2@3365.63,3185.48 3413.15,3200 ; R15.2@3365.63,3214.52 3413.15,3200 ; R17.1@3453.72,3191.2 3490,3155 ; R17.1@3459.37,3185.48 3411.85,3200 ; R17.1@3459.37,3214.52 3411.85,3200 ; R17.1@3461.54,3200 3411.85,3200 ; R17.1@3465.47,3200 3490,3155 ; R17.1@3479.24,3205.11 3490,3155 ; U1.11@3633.19,3124.57 3620.43,3124.57 ; U1.11@3656.81,3124.57 3620.43,3124.57 ; 3490,3155 3590,3155 3620.43,3124.57
NetR19_1: R19.1 U1.20 | length 512
  Bottom Layer w10: U1.20@3883.19,3073.39 3886.57,3070 4123.5,3070 R19.1@4168.5,3025 ; U1.20@3906.81,3073.39 3943.86,3070 ; R19.1@4154.67,3016.34 4127.61,3065.9 ; R19.1@4166.54,3025 4127.61,3065.9 ; R19.1@4175.77,3036.42 4127.61,3065.9
NetR20_1: R20.1 U1.18 | length 516.7
  Top Layer w10: R20.1@3988.89,3138.41 v1(3950,3125) ; R20.1@3989.78,3118.48 v1(3950,3125) ; R20.1@3989.95,3128.34 v1(3950,3125) ; R20.1@4002.95,3144.24 v1@3956.56,3125 ; R20.1@4005.85,3115.33 v1@3956.56,3125 ; R20.1@4006.54,3130 v1@3956.56,3125 ; R20.1@4008.5,3130 4003.5,3125 v1(3950,3125)
  Bottom Layer w10: U1.18@3883.19,3124.57 3949.57,3124.57 v1(3950,3125) ; U1.18@3906.81,3124.57 v1@3943.7,3124.57 ; v1(3950,3125) 3909.99,3124.57 v1(3950,3125)
NetR23_2: R23.2 U2.2 | length 269.4
  Top Layer w10: R23.2@2541.68,3209.43 2584.76,3188.74 ; R23.2@2550,3221.54 2584.76,3188.74 ; R23.2@2550,3223.5 2584.76,3188.74 ; R23.2@2561.6,3230.54 2584.76,3188.74 ; U2.2@2661.61,3188.74 2584.76,3188.74
NetR24_2: R24.2 U2.3 | length 250.7
  Top Layer w10: R24.2@2541.99,3140.77 2580.75,3157.24 ; R24.2@2550,3126.5 2580.75,3157.24 ; R24.2@2550,3128.46 2580.75,3157.24 ; R24.2@2561.75,3119.66 2580.75,3157.24 ; U2.3@2661.61,3157.24 2580.75,3157.24
NetR30_2: R30.2 U2.10 | length 283
  Top Layer w10: R30.2@2730.54,2816 2746.26,2863.18 ; R30.2@2745,2813.46 2746.26,2863.18 ; R30.2@2746.26,2812.76 U2.10@2746.26,2946.61 ; R30.2@2759.57,2815.26 2746.26,2863.18
NetR31_2: R31.2 U2.15 | length 293
  Top Layer w10: U2.15@2903.74,2946.61 2903.74,2886.26 2925,2865 R31.2@2925,2811.5 ; R31.2@2910.48,2815.63 2925,2863.15 ; R31.2@2925,2813.46 2925,2863.15 ; R31.2@2939.52,2815.63 2925,2863.15
NetR32_2: R32.2 U2.13 | length 289.7
  Top Layer w10: R32.2@2820.8,2817.22 2840.75,2863.87 ; R32.2@2835,2811.5 2840.75,2817.24 U2.13@2840.75,2946.61 ; R32.2@2835,2813.46 2840.75,2863.87 ; R32.2@2849.68,2813.93 2840.75,2863.87
NTC1+: C29.2 P4.6 R28.2 U2.8 | length 3972.8
  Top Layer w10: U2.8@2661.61,2999.76 2709.76,2999.76 2735,3025 v1(2805,3025) ; v1(3045,3260) 3045,3360 v1(3125,3440)
  VCC w10: v1(2805,3025) 2990,3025 3045,3080 v1(3045,3260) 3045,3220 ; v1(3125,3440) 4760,3440 4997.28,3202.72 P4.6@4997.28,3099.76 ; P4.6@4958.48,3110.54 4997.28,3175.04 ; P4.6@4967.63,3105.85 4997.28,3175.04 ; P4.6@4977.19,3102.49 4997.28,3175.04 ; P4.6@4987.03,3100.47 4997.28,3175.04 ; P4.6@5007.54,3100.47 4997.28,3175.04 ; P4.6@5017.37,3102.49 4997.28,3175.04 ; P4.6@5026.94,3105.85 4997.28,3175.04 ; P4.6@5036.09,3110.54 4997.28,3175.04
  Bottom Layer w10: R28.2@2791.97,2897.17 2806.5,2944.68 R28.2@2821.02,2897.17 ; C29.2@2791.97,2982.83 2806.5,2935.32 C29.2@2821.02,2982.83 ; C29.2@2791.97,2987.15 v1(2805,3025) ; C29.2@2805,2986.5 v1(2805,3025) ; R28.2@2806.5,2895 C29.2@2806.5,2985 v1(2805,3025) ; C29.2@2820.82,2988.23 v1(2805,3025)
PWM: P3.2 R16.1 U1.22 U2.28 | length 2856.9
  Top Layer w10: 2831.74,3323.26 v1(2795,3350) 2805,3350 2840.75,3314.25 U2.28@2840.75,3273.39 ; v1(3622.2,3350) v1(3950,3022.2) 3918.79,3053.42
  VCC w10: P3.2@2070.87,3116.85 2304.02,3350 v1(2795,3350) ; 2755,3350 v1(2795,3350) ; v1(3622.2,3350) v1(2795,3350)
  Bottom Layer w10: U1.22@3883.19,3022.2 v1(3950,3022.2) ; U1.22@3906.81,3022.2 v1@3943.7,3022.2 ; R16.1@3989.2,3034.11 v1(3950,3022.2) ; R16.1@3989.68,3014.17 v1(3950,3022.2) ; R16.1@3989.99,3024.07 v1(3950,3022.2) ; R16.1@4003.56,3039.38 v1@3956.77,3022.2 ; R16.1@4005.19,3010.38 v1@3956.77,3022.2 ; R16.1@4006.54,3025 v1@3956.77,3022.2 ; R16.1@4008.5,3025 4005.71,3022.2 v1(3950,3022.2) ; v1(3950,3022.2) 3910,3022.2 v1(3950,3022.2)
RXD: U2.20 U3.1 | length 1032
  Top Layer w10: U3.1@2609.49,2655 v1(2670,2655) ; U3.1@2640.98,2655 v1(2670,2655) ; U3.1@2641.78,2648.24 v1(2670,2655) ; U3.1@2641.78,2661.76 v1(2670,2655) ; v1@2915,3094.25 U2.20@2988.39,3094.25 ; v1(2915,3095) U2.20@2955.02,3094.25
  VCC w10: 2638.79,2686.21 v1(2670,2655) 2590,2735 2590,2905 2780,3095 v1(2915,3095) 2875,3095
SENSE_N: C9.2 C10.2 C11.2 C12.1 C13.1 C18.2 C19.2 D2.2 P4.1 P4.2 R7.1 R9.2 R12.2 R15.1 T1.1 | length 12084.6
  Top Layer w10: T1.1@4261,2525.05 4285,2579.53 ; R9.2@4270.48,2614.37 4285,2566.85 ; T1.1@4270.58,2521.77 4285,2579.53 ; R9.2@4285,2616.54 4285,2566.85 ; R9.2@4285,2618.5 T1.1@4285,2520 4518.11,2520 C13.1@4520,2518.11 4450.6,2520 ; T1.1@4286.77,2505.58 4344.53,2520 ; T1.1@4286.77,2534.42 4344.53,2520 ; T1.1@4290.05,2496 4344.53,2520 ; T1.1@4290.05,2544 4344.53,2520 ; T1.1@4299.42,2521.77 4285,2579.53 ; R9.2@4299.52,2614.37 4285,2566.85 ; T1.1@4309,2525.05 4285,2579.53 ; C13.1@4510.59,2485.05 4450.6,2520 ; C13.1@4512.4,2551.63 4450.6,2520 ; C13.1@4515.07,2494.24 4450.6,2520 ; C13.1@4516.38,2542.21 4450.6,2520 ; C13.1@4518.12,2503.86 4450.6,2520 ; C13.1@4518.9,2532.44 4450.6,2520
  Top Layer w50: 4711.3,2499.62 C13.1@4520,2518.11 ; D2.2@4767.13,2518.11 P4.2@4997.28,2478.11 ; P4.2@4958.23,2484.9 D2.2@4770,2491.26 ; P4.2@4997.28,2474.17 P4.1@4997.28,2320.24 ; C13.1@4520,2518.11 P4.2@4955.31,2518.11 ; C13.1@4520,2518.11 4581.44,2518.11 D2.2@4770,2491.26 ; C11.2@4682.99,2220 4897.05,2220 P4.1@4997.28,2320.24 ; C11.2@4682.99,2220 C9.2@4682.99,2350 4682.99,2223.94 4682.99,2346.06 C11.2@4682.99,2220 ; C11.2@4682.99,2220 4682.99,2087.01 4682.99,2216.06 4690,2084.92 C11.2@4682.99,2220 ; D2.2@4770,2491.26 P4.2@4955.31,2518.11 ; P4.2@4955.31,2518.11 P4.2@4997.28,2476.14 P4.1@4997.28,2320.24
  VCC w10: v1(3300,3250) 3345,3295 4370,3295 4630,3035 v1(4630,2385) ; v1(4200,3210) 4235,3175 4428.28,3175 4470,3133.28 4470,2350 4495,2325 v1(4630,2325)
  Bottom Layer w10: R15.1@3283.99,3202.22 v1@3298.5,3248.5 ; R15.1@3286.92,3211.57 v1(3300,3250) ; R15.1@3298.5,3200 v1@3298.5,3248.5 ; R15.1@3298.5,3209.92 v1(3300,3250) ; R15.1@3310.32,3210.82 v1(3300,3250) ; R15.1@3313.02,3202.22 v1@3298.5,3248.5 ; R12.2@4161.5,3210 v1(4200,3210) ; R12.2@4163.46,3210 v1(4200,3210) ; R12.2@4166.42,3195.61 v1(4200,3210) ; R12.2@4166.42,3224.39 v1(4200,3210) ; R7.1@4688.54,2379.64 v1(4630,2325) ; R7.1@4694.89,2278.08 v1(4630,2325) ; R7.1@4695.18,2371.52 v1(4630,2325) ; R7.1@4700.47,2286.97 v1(4630,2325) ; R7.1@4700.62,2362.76 v1(4630,2325) ; R7.1@4704.77,2296.34 v1(4630,2325) ; R7.1@4704.83,2353.51 v1(4630,2325) ; R7.1@4707.8,2306.04 v1(4630,2325) ; R7.1@4707.82,2343.9 v1(4630,2325) ; R7.1@4709.56,2315.95 v1(4630,2325) ; v1@3298.5,3248.5 v1(3300,3250) ; v1(4630,2325) 4704.92,2325 R7.1@4709.92,2330 v1(4630,2325)
  Bottom Layer w50: C18.2@4756.06,2492.01 C10.2@4627.99,2495 ; P4.2@4997.28,2474.17 P4.1@4997.28,2320.24 P4.2@4997.28,2476.14 4959.76,2513.66 C19.2@4885,2513.66 ; P4.2@4997.28,2478.11 C19.2@4885,2513.66 ; 4627.99,2411.93 C10.2@4627.99,2495 ; 4627.99,2411.93 R7.1@4709.92,2330 v1(4630,2385) ; 4627.99,2411.93 4683.97,2319.76 v1(4630,2385) ; 4627.99,2411.93 4727.7,2370.86 v1(4630,2385) ; 4627.99,2411.93 4709.92,2341.81 v1(4630,2385) ; 4627.99,2411.93 4627.99,2491.06 v1(4630,2385) ; 4627.99,2411.93 v1(4630,2385) ; 4627.99,2411.93 v1(4630,2385) ; 4627.99,2411.93 v1(4630,2385) ; 4627.99,2411.93 v1(4630,2385) ; 4627.99,2411.93 v1(4630,2385) ; 4627.99,2411.93 v1(4630,2385) ; C10.2@4627.99,2495 4757.01,2495 C18.2@4760,2492.01 ; C10.2@4627.99,2495 v1(4630,2385) ; C18.2@4760,2492.01 C19.2@4863.35,2492.01 ; C18.2@4760,2492.01 C19.2@4885,2513.66 ; C19.2@4863.35,2492.01 C19.2@4885,2513.66 ; C19.2@4863.35,2492.01 4763.94,2492.01 C19.2@4885,2513.66
  other v1: 4750,2050 4800,2050 4850,2050 4625,2100 4750,2100 4800,2100 4850,2100 4625,2150 4750,2150 4800,2150 4850,2150 4625,2200 4750,2200 4800,2200 4850,2200 4900,2200 4950,2200 4625,2250 4750,2250 4800,2250 4850,2250 4900,2250 5000,2250 4750,2300 4800,2300 4850,2300 4900,2300 4750,2350 4800,2350 4850,2350 4900,2350 4750,2400 4800,2400 4850,2400 4900,2400 4625,2450 4675,2450 4900,2450
SENSE_P: L1.2 R6.1 R11.2 | length 3569.1
  VCC w10: v1(4200,3120) 4235,3155 4420,3155 4450,3125 4450,2350 4425,2325 v1(4285,2325)
  Bottom Layer w10: R11.2@4161.5,3120 v1(4200,3120) ; R11.2@4163.46,3120 v1(4200,3120) ; R11.2@4166.42,3105.61 v1(4200,3120) ; R11.2@4166.42,3134.39 v1(4200,3120) ; R6.1@4210.14,2166.85 4285,2230.2 ; R6.1@4217.22,2159.33 4285,2230.2 ; R6.1@4224.94,2152.68 4285,2230.2 ; R6.1@4233.24,2146.91 4285,2230.2 ; R6.1@4242.04,2142.05 4285,2230.2 ; R6.1@4255.08,2125 4285,2154.92 v1(4285,2325) ; R6.1@4255.08,2136.81 4285,2230.2 ; R6.1@4268.74,2133.49 4285,2230.2 ; R6.1@4278.71,2132.34 4285,2230.2 ; R6.1@4288.82,2132.21 4285,2230.2 ; R6.1@4298.98,2133.14 4285,2230.2 ; R6.1@4309.11,2135.14 4285,2230.2
  Bottom Layer w50: L1.2@4020.29,2178.78 4167.17,2125 ; L1.2@4047.17,2225.31 4167.17,2125 ; L1.2@4047.17,2245 4167.17,2125 ; L1.2@4088.2,2260.01 4167.17,2125 ; R6.1@4248.48,2091.59 4167.17,2125 ; R6.1@4248.48,2158.41 4167.17,2125 ; R6.1@4255.08,2125 4167.17,2125
STATE: D5.2 R38.1 U2.18 | length 1074.3
  Top Layer w10: U2.18@2988.39,3031.26 3028.74,3031.26 3050,3010 3050,2857.4 D5.2@3037.6,2845 3037.6,2744.09 R38.1@3033.5,2740 3037.6,2790.04 ; D5.2@3017.36,2837.25 3037.6,2785.47 ; D5.2@3018.5,2856.62 3050,2907.33 ; R38.1@3019.2,2743.33 3037.6,2790.04 ; D5.2@3027.06,2840.05 3037.6,2785.47 ; D5.2@3027.47,2852.05 3050,2907.33 ; D5.2@3037.6,2841.06 3037.6,2785.47 ; D5.2@3037.6,2848.94 3050,2907.33 ; D5.2@3048.11,2847.66 3050,2907.33 ; R38.1@3048.16,2740.96 3037.6,2790.04 ; D5.2@3048.14,2840.05 3037.6,2785.47 ; D5.2@3057.83,2837.25 3037.6,2785.47 ; D5.2@3058.18,2848.2 3050,2907.33
SWCLK: P3.4 U2.24 | length 1164.5
  Top Layer w10: v1(2930,3215) U2.24@2971.68,3220.24 ; v1@2935.24,3220.24 U2.24@2988.39,3220.24
  VCC w10: P3.4@2070.87,2959.37 2396.5,3285 2850,3285 2920,3215 v1(2930,3215) 2892.6,3242.4
SWDIO: P3.5 U2.23 | length 1183.5
  Top Layer w10: 2930,3188.74 v1(2890,3188.75) U2.23@2988.39,3188.74
  VCC w10: P3.5@2070.87,2880.63 2445.24,3255 2825,3255 v1@2890,3190 ; 2859.49,3220.51 v1(2890,3188.75)
TEC: P3.3 U2.30 | length 869.9
  Top Layer w10: v1(2765,3325) 2777.76,3312.24 U2.30@2777.76,3273.39
  VCC w10: P3.3@2070.87,3038.11 2357.76,3325 v1(2765,3325)
TP1: P1.2 U2.26 | length 341.5
  Top Layer w10: P1.2@2857.7,3388.78 2903.74,3376.26 ; P1.2@2861.41,3398.28 2903.74,3376.26 ; P1.2@2870,3410 2903.74,3376.26 ; P1.2@2881.72,3418.59 2903.74,3376.26 ; P1.2@2891.22,3422.3 2903.74,3376.26 ; U2.26@2903.74,3273.39 2903.74,3376.26
TXD: U2.19 U3.4 | length 901.6
  Top Layer w10: U3.4@2605.83,2810.74 v1@2650.53,2835.18 ; U3.4@2613.88,2799.79 v1@2650.53,2835.18 ; 2619.57,2818.25 v1(2655.36,2840) ; U3.4@2621.62,2813.92 v1(2655.36,2840) ; U3.4@2623.83,2809.4 v1(2655.36,2840) ; U2.19@2975.21,3062.76 v1(2935,3065) 2937.24,3062.76 U2.19@2988.39,3062.76 ; v1@2650.53,2835.18 U3.4@2609.49,2805 2620.36,2805 v1(2655.36,2840)
  VCC w10: v1(2655.36,2840) 2655.36,2929.64 2790.71,3065 v1(2935,3065) 2895,3065
UVP: R35.1 R36.2 U2.9 | length 855.6
  Top Layer w10: 2685,2796.58 v1(2686.5,2756.5) 2685,2755 2685,2935 2696.61,2946.61 ; U2.9@2713.83,2940.86 2696.61,2946.61 ; U2.9@2713.83,2952.37 2696.61,2946.61 ; U2.9@2714.76,2946.61 2696.61,2946.61
  Bottom Layer w10: 2727.3,2748.25 v1(2686.5,2756.5) ; 2727.3,2764.74 v1(2686.5,2756.5) ; R35.1@2747.83,2741.97 2700.31,2756.5 ; R35.1@2747.83,2771.02 2700.31,2756.5 ; R35.1@2752.17,2741.97 2799.69,2756.5 R35.1@2752.17,2771.02 ; R36.2@2837.83,2741.97 2790.32,2756.5 R36.2@2837.83,2771.02 ; R36.2@2840,2756.5 R35.1@2750,2756.5 v1(2686.5,2756.5) ; v1(2686.5,2756.5) 2700.31,2756.5 ; v1(2686.5,2756.5) 2700.31,2756.5
VREF: C8.2 R8.1 R16.2 U1.5 U1.10 U1.13 | length 2096.5
  Top Layer w10: C8.2@3512.39,3015.93 3526.5,2993.5 ; C8.2@3528.46,3020 3578.15,3020 ; C8.2@3530.63,3005.48 3578.15,3020 ; C8.2@3530.63,3034.52 3578.15,3020 ; C8.2@3540.61,3015.93 3526.5,2993.5 ; v1(3595,3110) 3655,3110 ; v1(3609.25,3175.75) 3655,3130 3655,3110 ; 3526.5,2993.5 C8.2@3526.5,3020 3630,3020 3655,3045 3655,3110 ; 3526.5,2993.5 3550,2970 ; 3550,2970 v1(3590,2970) 3550,2970
  VCC w10: v1(3590,2970) 3630,2930 3865,2930 3910,2975 4090,2975 4120,3005 v1(4120,3010) 4091.77,2976.77
  Bottom Layer w10: R8.1@3449.31,3286.22 3463.5,3261.5 ; R8.1@3463.5,3290 3463.5,3261.5 ; R8.1@3477.69,3286.22 3463.5,3261.5 ; v1(3595,3110) 3605,3100 3655.79,3100 U1.10@3656.81,3098.98 ; v1@3596.3,2971.02 U1.5@3633.19,2971.02 ; U1.5@3630.04,2971.02 v1(3590,2970) ; U1.5@3630.08,2971.02 v1(3590,2970) ; U1.13@3633.19,3175.75 v1(3609.25,3175.75) ; U1.5@3656.81,2971.02 3591.02,2971.02 v1(3590,2970) ; U1.13@3656.81,3175.75 v1(3609.25,3175.75) ; R16.2@4071.5,3025 4105,3025 ; R16.2@4073.46,3025 4105,3025 ; R16.2@4076.88,3010.72 4105,3025 ; R16.2@4076.88,3039.28 4105,3025 ; 3463.5,3261.5 3480,3245 3575,3245 3609.25,3210.75 v1(3609.25,3175.75) ; 4105,3025 v1(4120,3010) 4105,3025
pads on no net: R10.3 U2.7 U2.11 U2.22 U2.25 U2.27 U2.29

## Polygon pours and split planes (outlines as drawn)
IN_P on Bottom Layer "IS_P" (solid, remove dead copper, pour order 35): 2000,2325 2025,2350 2575,2350 2600,2325 2600,2025 2575,2000 2225,2000 2175,2050 2175,2125 2125,2175 2050,2175 2000,2225 2000,2325
IN_N on Bottom Layer "IS_P" (solid, remove dead copper, pour order 34): 2675,2325 2700,2350 3065,2350 3095,2320 3095,2025 3070,2000 2700,2000 2675,2025 2675,2325
NetC7_1 on Bottom Layer "IS_P" (solid, remove dead copper, pour order 33): 3110,2325 3135,2350 3425,2350 3450,2375 3450,2405 3470,2425 3775,2425 3800,2400 3800,2025 3775,2000 3225,2000 3200,2025 3200,2125 3190,2135 3120,2135 3110,2145 3110,2325
SENSE_P on Bottom Layer "IS_P" (solid, remove dead copper, pour order 32): 3950,2400 3975,2425 4300,2425 4325,2400 4325,2025 4300,2000 3975,2000 3950,2025 3950,2400
NetR6_2 on Bottom Layer "IS_P" (solid, remove dead copper, pour order 31): 4350,2400 4375,2425 4550,2425 4575,2400 4575,2025 4550,2000 4375,2000 4350,2025 4350,2400
SENSE_N on Bottom Layer "IS_P" (solid, remove dead copper, pour order 30): 4575,2425 4575,2525 4600,2550 5050,2550 5075,2525 5075,2225 5025,2175 4950,2175 4900,2125 4900,2050 4850,2000 4625,2000 4600,2025 4600,2400 4575,2425
LD- on Bottom Layer "IS_P" (solid, remove dead copper, pour order 29): 4605,2580 4605,2950 4630,2975 4900,2975 4925,2950 4925,2900 4950,2875 5050,2875 5075,2850 5075,2585 5050,2560 4625,2560 4605,2580
GND on Bottom Layer "IS_P" (solid, remove dead copper, pour order 28): 2030,2500.08 2080,2550.08 2305,2550.08 2335,2580.08 3180,2580.08 3205,2605.08 3205,3450.08 3230,3475.08 4855,3475.08 4905,3425.08 4905,3350.08 4955,3300.08 5030,3300.08 5080,3250.08 5080,3200.08 5055,3175.08 4955,3175.08 4930,3150.08 4930,3025.08 4905,3000.08 4530,3000.08 4505,2975.08 4505,2935.08 4535,2905.08 4585,2905.08 4600,2890.08 4600,2580.08 4565,2545.08 4565,2470.08 4545,2450.08 4455,2450.08 4430,2475.08 3395,2475.08 3370,2450.08 3370,2380.08 3350,2360.08 2055,2360.08 2030,2385.08 2030,2500.08
GND on GND "IS_P" (solid, remove dead copper, pour order 37): 2330,2580 2025,2580 2000,2555 2000,2550 2000,2225 2050,2175 2125,2175 2175,2125 2175,2050 2225,2000 4850,2000 4900,2050 4900,2125 4950,2175 5025,2175 5075,2225 5075,3250 5025,3300 4950,3300 4900,3350 4900,3425 4850,3475 3225,3475 3200,3450 3200,2605 3175,2580 2330,2580
LP- on GND "IS_P" (solid, remove dead copper, pour order 36): 2000,3250 2050,3300 2125,3300 2175,3350 2175,3425 2225,3475 3150,3475 3175,3450 3175,2615 3150,2590 2025,2590 2000,2615 2000,3250
IN_P on Mechanical 15 "IS_P" (solid, remove dead copper): 2440,2050 2465,2050 2495,2020 2440,2020 2415,2020 2405,2030
LP- on Top Layer "IS_P" (solid, remove dead copper, pour order 39): 2000,3250 2050,3300 2125,3300 2175,3350 2175,3425 2225,3475 2300,3475 2325,3450 2325,2800 2300,2775 2050,2775 2025,2775 2000,2800 2000,3250
SENSE_N on Top Layer "IS_P" (solid, remove dead copper, pour order 41): 4475,2425 4450,2450 4450,2575 4475,2600 4550,2600 4600,2550 5050,2550 5075,2525 5075,2225 5025,2175 4950,2175 4900,2125 4900,2050 4850,2000 4625,2000 4600,2025 4600,2400 4575,2425 4475,2425
GND on Top Layer "IS_P" (solid, remove dead copper, pour order 40): 2000,2385 2025,2360 2635,2360 2675,2320 2675,2025 2700,2000 4550,2000 4575,2025 4575,2375 4550,2400 4475,2400 4425,2450 4425,2600 4450,2625 4575,2625 4640,2560 5050,2560 5075,2585 5075,3250 5025,3300 4950,3300 4900,3350 4900,3425 4850,3475 3225,3475 3200,3450 3200,2605 3175,2580 2455,2580 2425,2550 2020,2550 2000,2530 2000,2385
IN_P on Top Layer "IS_P" (solid, remove dead copper, pour order 38): 2000,2325 2025,2350 2575,2350 2600,2325 2600,2025 2575,2000 2225,2000 2175,2050 2175,2125 2125,2175 2050,2175 2000,2225 2000,2325

## Keep-outs
Keep-Out Layer:
  circle w5: c2066.93,3405.51 r61.02
  circle w5: c2066.93,2066.93 r61.02
  circle w5: c5019.69,2066.93 r61.02
  circle w5: c5019.69,3405.51 r61.02
  lines w5: 1968.5,1968.5 5118.11,1968.5 5118.11,3503.94 1968.5,3503.94 1968.5,1968.5

## Silkscreen, mask and mechanical layers (free items; w line width, h text height)
Top Overlay:
  drawing of 731 lines, arcs and shapes, not listed
  text "Designed as:" at 4245,3405 h50
  text "3V3" at 3050,3380 h40
  text "Input : 12V" at 4240,3320 h50
  text "FAULT" at 3015,3274.57 h50
  text "6AMax" at 4780,3235 h50
  text "Output:  4V" at 4230,3230 h50
  text "GND" at 4215,2825 h40
  text "PWR" at 3265,2789.57 h50
  text "DO NOT USE HANDS !" at 3045,2530 h50
  text "LD+" at 4225,2415 h40
  text "WEAR GLOVES !" at 3183,2120 h50
  text "12V" at 2230,2030 h40
  text "AOE-G-3.1 2015.6" at 3100,2015 h50
Bottom Overlay:
  circle w10: c2066.93,2066.93 r106.3
  circle w10: c2066.93,3405.51 r106.3
  circle w10: c5019.69,2066.93 r106.3
  circle w10: c5019.69,3405.51 r106.3
  lines w2: 2875,2895 2875,2920 2845.87,2949.13 2845.87,2949.57 ; 3955,3255 3995,3255 4009.13,3240.87 ; 3969.13,3235.87 3969.57,3235.87 ; 2845.87,2949.57 2848.78,2949.57 2845.87,2949.57
  lines w10: 1968.5,1968.5 5118.11,1968.5 5118.11,3503.94 1968.5,3503.94 1968.5,1968.5
  text "DGND" at 2020,3290 h30 r90
  text "PWM" at 2020,3160 h30 r90
  text "--" at 2155,3145 h30
  text "--" at 2155,3065 h30
  text "TEC" at 2020,3060 h30 r90
  text "--" at 2155,2985 h30
  text "LINK" at 2020,2960 h30 r90
  text "-NTC+" at 5065,2955 h30 r270
  text "--" at 5095,2850 h30
  text "GND" at 4345,2835 h40
  text "--" at 2155,2825 h30
  text "485" at 2020,2815 h30 r90
  text "3V3" at 2025,2690 h30 r90
  text "LD-" at 5065,2675 h30 r270
  text "--" at 2155,2670 h30
  text "--" at 5095,2540 h30
  text "--->" at 2600,2535 h40 r270
  text "LD+" at 4340,2430 h40
  text "GND" at 2015,2395 h30 r270
  text "LD+" at 5065,2370 h30 r270
  text "12V" at 2045,2315 h30 r90
  text "12V" at 2330,2025 h40
Mechanical 2:
  lines w2: 2575,2350 2600,2325 ; 2575,2350 2400,2350 2025,2350 2000,2325 2000,2225 2050,2175 2125,2175 2175,2125 2175,2050 2225,2000 2400,2000 2575,2000 2600,2025 2600,2325 ; 2575,2350 2600,2325 ; 2000,2385 2025,2360 2050,2360 2360,2360 2635,2360 2675,2320 2675,2025 2700,2000 4550,2000 4575,2025 4575,2375 4550,2400 4475,2400 4425,2450 4425,2600 4450,2625 4575,2625 4640,2560 5050,2560 5075,2585 5075,3200 5075,3250 5025,3300 4950,3300 4900,3350 4900,3425 4850,3475 3225,3475 3200,3450 3200,2605 3175,2580 2455,2580 2425,2550 2020,2550 2000,2530 2000,2385 ; 4450,2450 4450,2575 4475,2600 4550,2600 4600,2550 5050,2550 5075,2525 5075,2225 5025,2175 4950,2175 4900,2125 4900,2050 4850,2000 4625,2000 4600,2025 4600,2400 4575,2425 4475,2425 4450,2450
Mechanical 3:
  lines w2: 2000,2225 2050,2175 2125,2175 2175,2125 2175,2050 2225,2000 2575,2000 2600,2025 2600,2325 2575,2350 2025,2350 2000,2325 2000,2225 ; 2000,2615 2025,2590 2515,2590 3150,2590 3175,2615 3175,3450 3155,3470 3150,3475 2225,3475 2175,3425 2175,3350 2125,3300 2050,3300 2000,3250 2000,2625 2000,2615 ; 2025,2385 2050,2360 3220,2360 3345,2360 3365,2380 3365,2450 3390,2475 4425,2475 4450,2450 4540,2450 4560,2470 4560,2545 4595,2580 4595,2890 4580,2905 4530,2905 4500,2935 4500,2975 4525,3000 4900,3000 4925,3025 4925,3150 4950,3175 5050,3175 5075,3200 5075,3250 5025,3300 4950,3300 4900,3350 4900,3425 4850,3475 3425,3475 3225,3475 3200,3450 3200,2605 3175,2580 2490,2580 2330,2580 2300,2550 2275,2550 2075,2550 2025,2500 2025,2385 ; 2675,2025 2700,2000 3070,2000 3095,2025 3095,2320 3065,2350 3025,2350 2700,2350 2675,2325 2675,2025 ; 3110,2145 3110,2325 3135,2350 3425,2350 3450,2375 3450,2405 3470,2425 3775,2425 3800,2400 3800,2325 3800,2025 3775,2000 3225,2000 3200,2025 3200,2125 3190,2135 3120,2135 3110,2145 ; 3950,2025 3975,2000 4300,2000 4325,2025 4325,2400 4300,2425 3975,2425 3950,2400 3950,2025 ; 4350,2025 4350,2040 4350,2385 4350,2400 4375,2425 4400,2425 4550,2425 4575,2400 4575,2025 4550,2000 4400,2000 4375,2000 4350,2025 ; 4575,2425 4600,2400 4600,2025 4625,2000 4850,2000 4900,2050 4900,2125 4950,2175 5025,2175 5075,2225 5075,2525 5050,2550 4600,2550 4575,2525 4575,2425 ; 4605,2580 4605,2950 4630,2975 4800,2975 4900,2975 4925,2950 4925,2925 4925,2900 4950,2875 5050,2875 5075,2850 5075,2585 5050,2560 4625,2560 4605,2580
Mechanical 15:
  lines w2: 2000,2225 2000,2245 2000,3250 2050,3300 2125,3300 2175,3350 2175,3425 2225,3475 4850,3475 4900,3425 4900,3350 4950,3300 5025,3300 5075,3250 5075,2225 5025,2175 4950,2175 4900,2125 4900,2050 4850,2000 2225,2000 2175,2050 2175,2125 2125,2175 2050,2175 2000,2225